# Altium PCB triumvi_integrated_v2_base.PcbDoc (part 1 of 2)
Units mil, origin at the board's own origin, x right, y up, seen from the top; angles counter-clockwise.
Board outline 2450 x 750 mil, 6 copper layers (Top Layer, GND, Signal Layer 1, Signal Layer 2, VCC, Bottom Layer), stack 48.468 mil thick; 139 components, 107 nets, 501 pads, 187 vias.
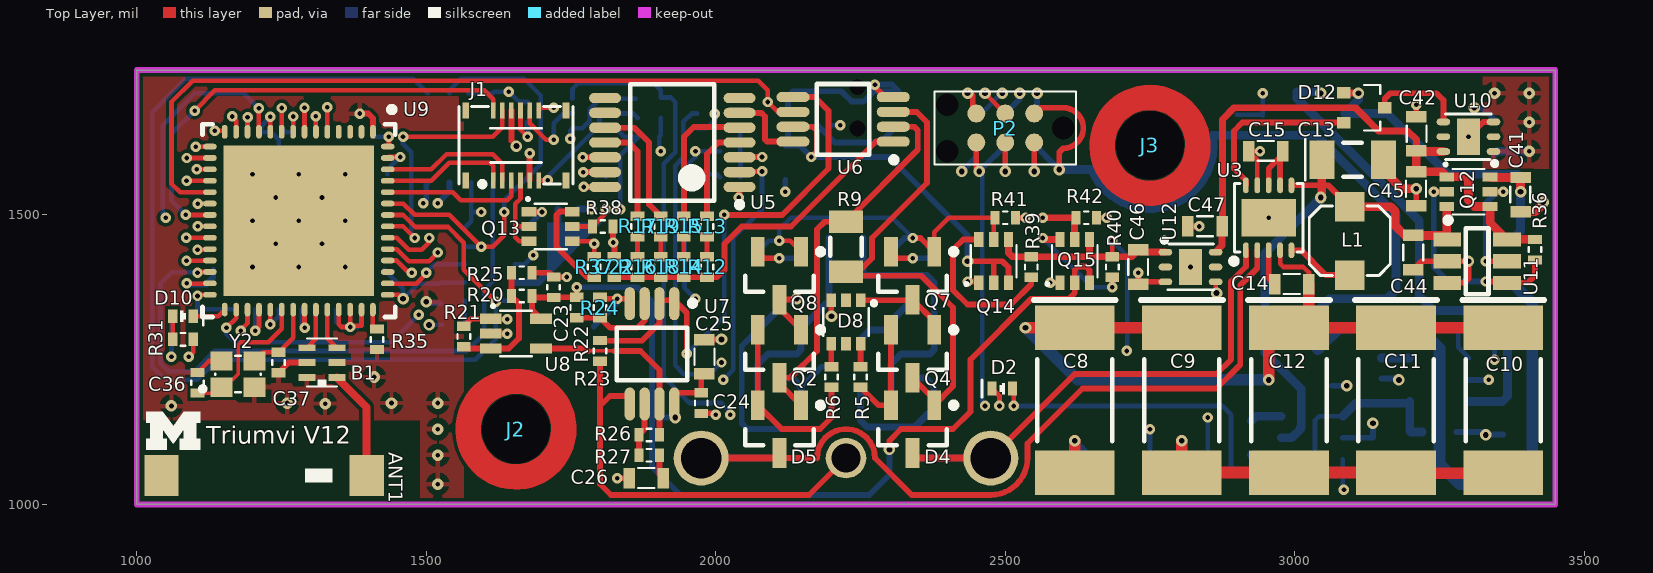
[diagram p0: Top Layer view]
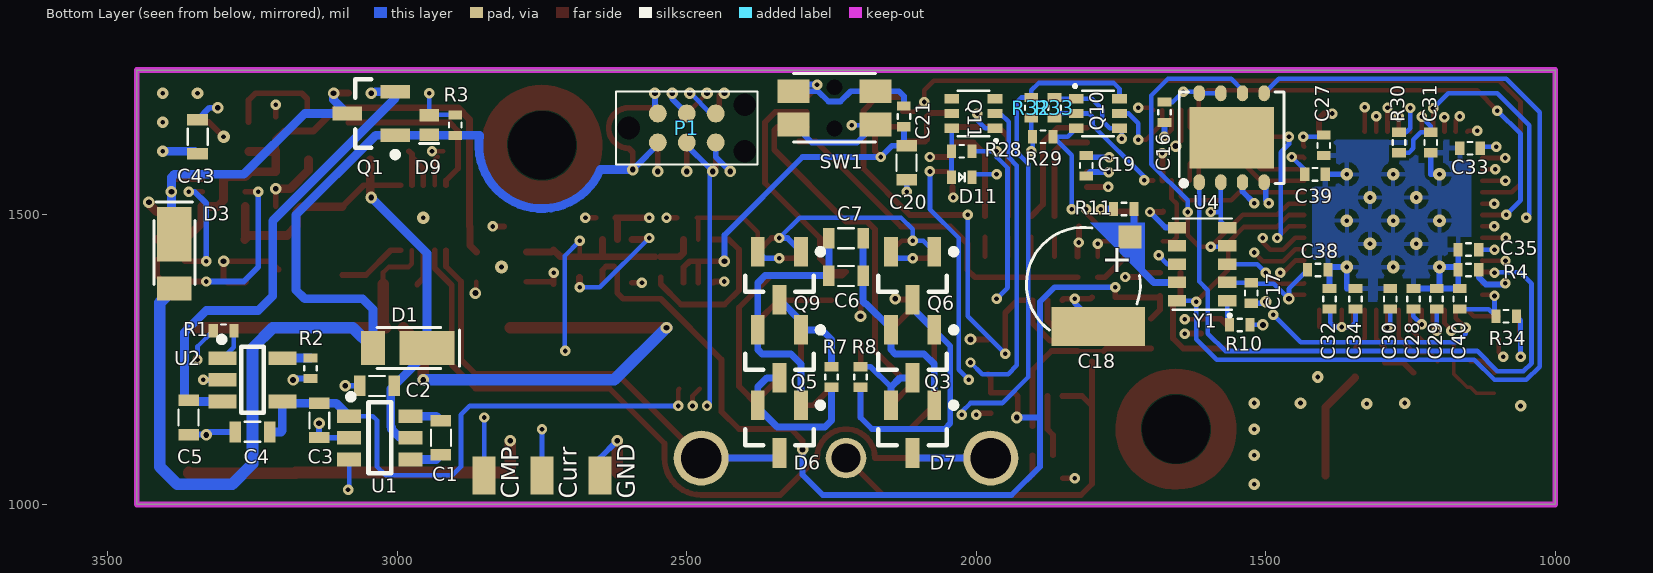
[diagram p1: Bottom Layer view, seen from below]
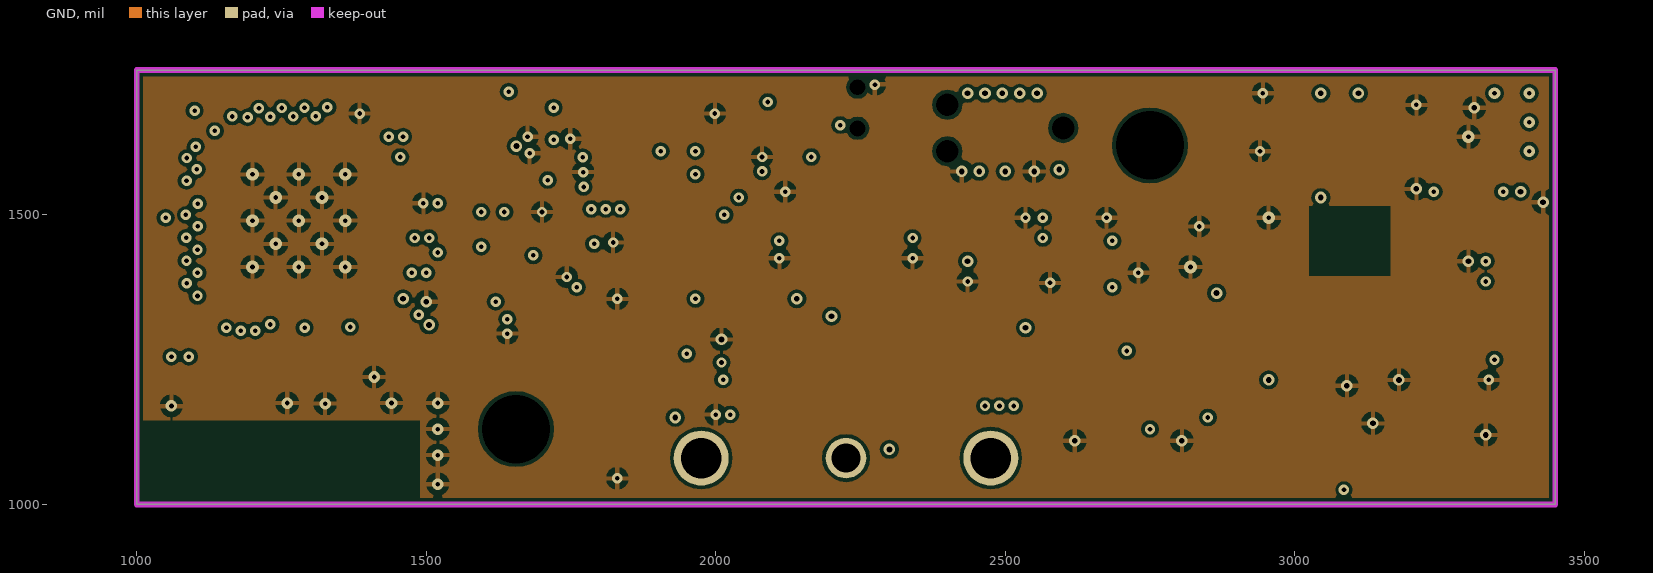
[diagram p2: GND]
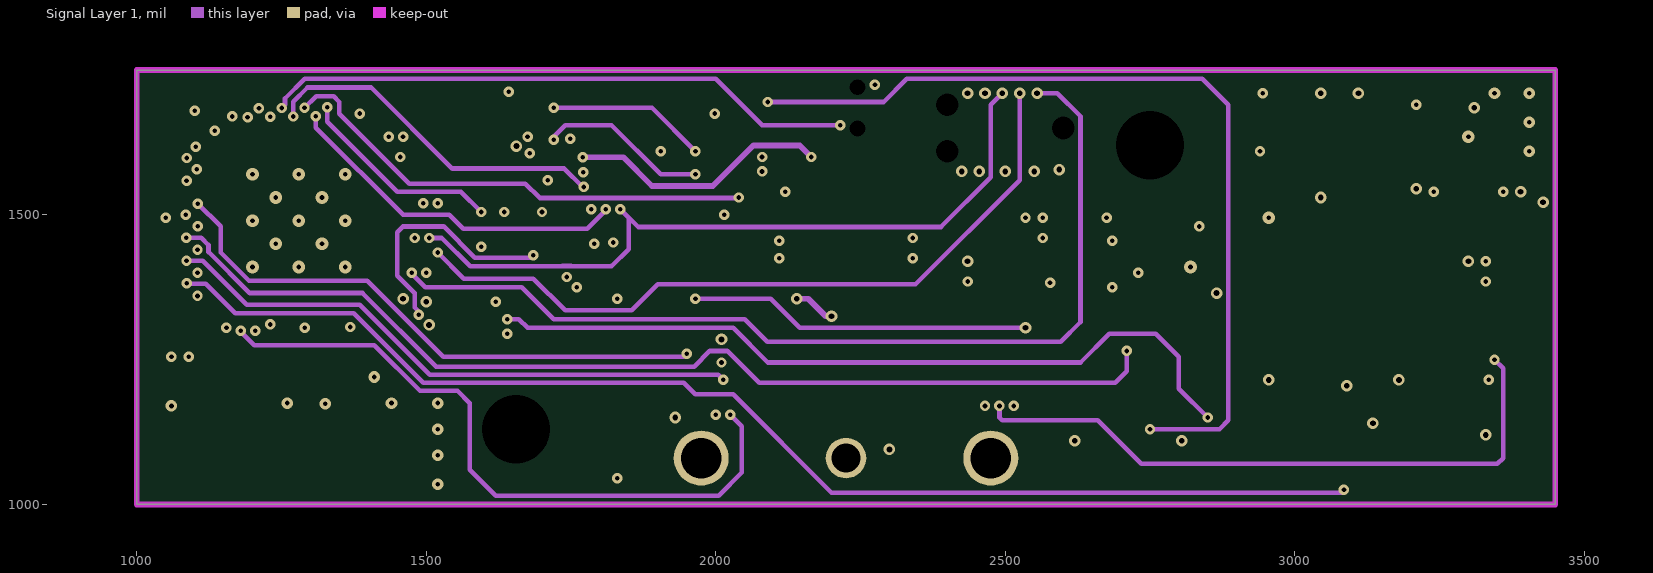
[diagram p3: Signal Layer 1]
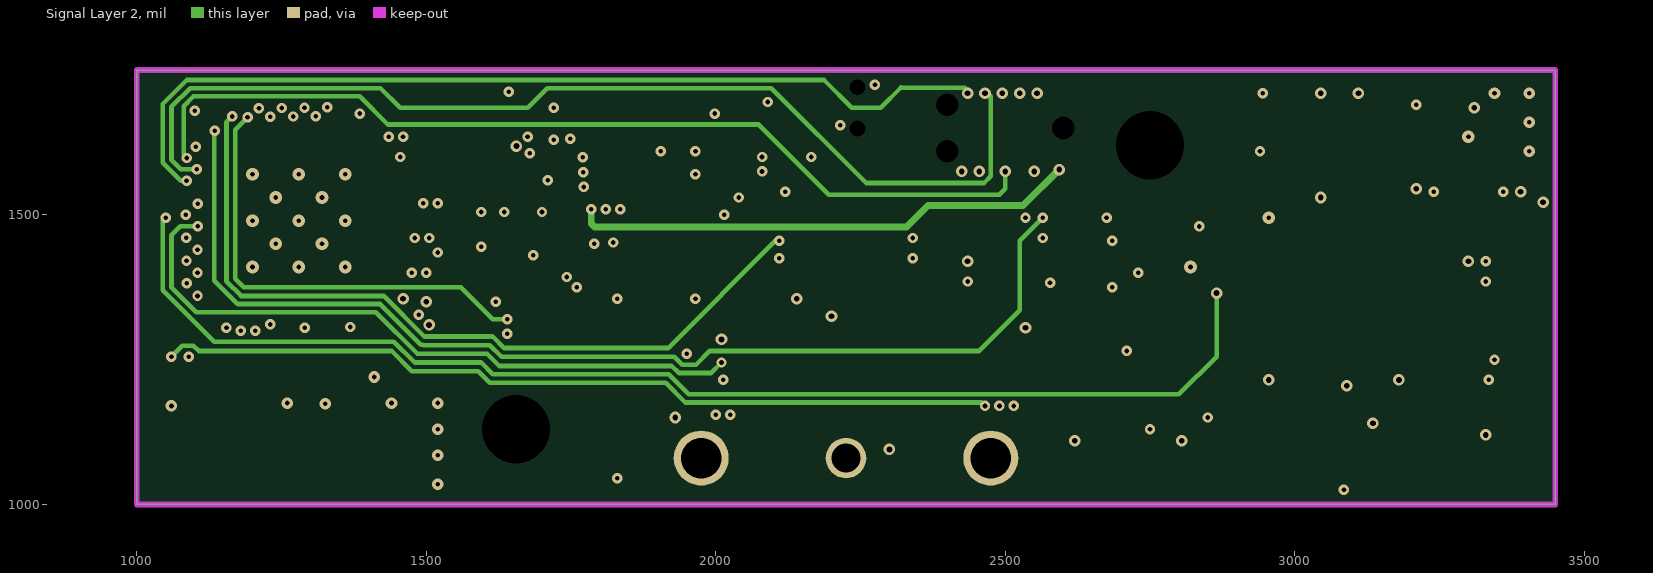
[diagram p4: Signal Layer 2]
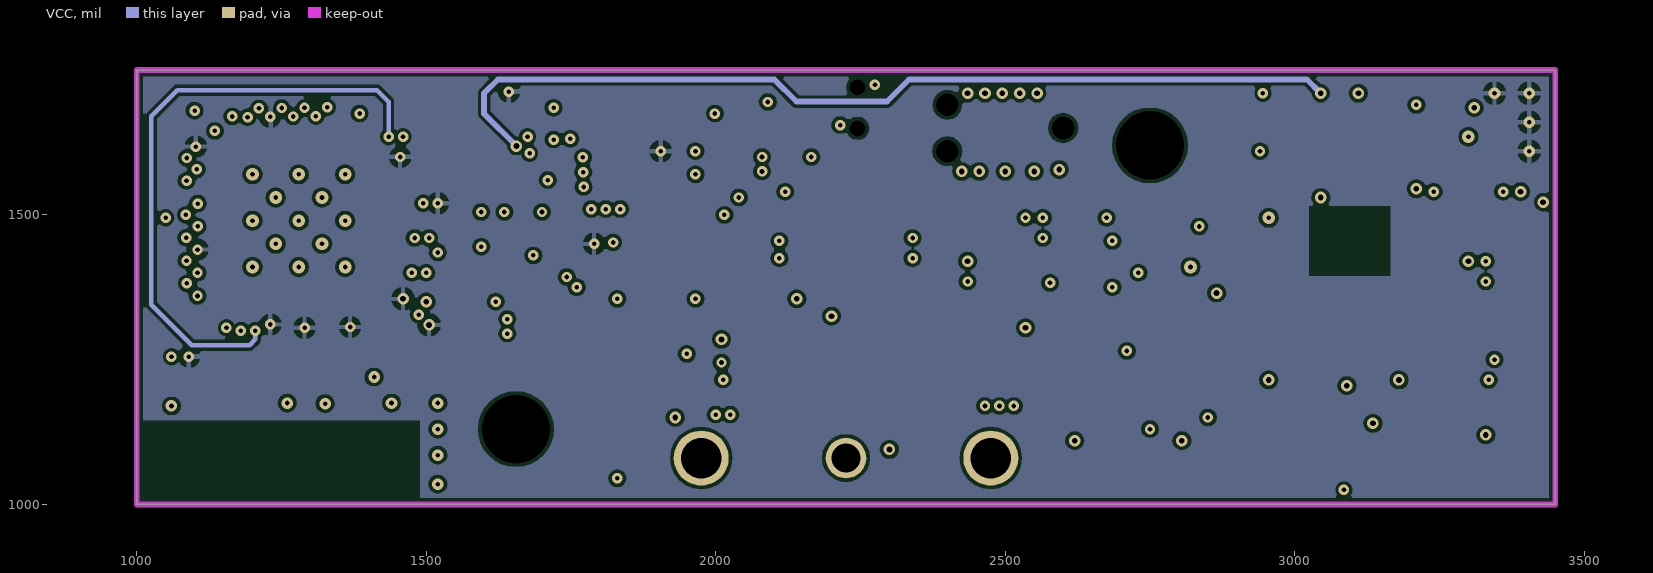
[diagram p5: VCC]

## Layer stack, top to bottom
Top Solder: solder mask 0.4, Solder Resist, Dk 3.5
Top Layer: signal copper 1.4
Dielectric 1: core 10, FR-4, Dk 4.2
GND: signal copper 1.417
Dielectric 5: core 10, Dk 4.2
Signal Layer 1: signal copper 1.417
Dielectric 4: prepreg 5, Dk 4.2
Signal Layer 2: signal copper 1.417
Dielectric 2: core 10, Dk 4.2
VCC: signal copper 1.417
Dielectric 3: prepreg 5, Dk 4.2
Bottom Layer: signal copper 1.4
Bottom Solder: solder mask 0.4, Solder Resist, Dk 3.5

## Board outline
1000,1000 3450,1000 3450,1750 1000,1750

## Design rules (kind name [scope] priority, off if disabled: settings)
Clearance "non plated holes" [InPadClass('NPHOLES')] p1: gap=10 // Sunstone Circuits Minimum Clearance Rule (MLB~4&6 Layer Designs)
Clearance "Clearance~Sunstone Circuits" [All] p2: gap=6 // Sunstone Circuits Minimum Clearance Rule (MLB~4&6 Layer Designs)
DiffPairsRouting [All] p1: maxlimit=10 minlimit=10 mostfreqgap=10 toplayer_minwidth=6 toplayer_maxwidth=15 toplayer_prefwidth=15 midlayer1_minwidth=6 midlayer1_maxwidth=15 midlayer1_prefwidth=15 midlayer2_minwidth=6 midlayer2_maxwidth=15 midlayer2_prefwidth=15 midlayer3_minwidth=15 midlayer3_maxwidth=15 midlayer3_prefwidth=15 midlayer4_minwidth=15 midlayer4_maxwidth=15 midlayer4_prefwidth=15 bottomlayer_minwidth=6 bottomlayer_maxwidth=15 bottomlayer_prefwidth=15 maxuncoupledlength=500
HoleSize "HoleSize~Sunstone Circuits" [All] p1: absolutevalues=TRUE maxlimit=251 minlimit=8 maxpercent=80.000 minpercent=20.000 // Sunstone Circuits Hole Size Rule (MLB~4&6 Layer Designs)
HoleSize Testpoint [All] p2: absolutevalues=TRUE maxlimit=100 minlimit=1 maxpercent=80.000 minpercent=20.000
HoleSize TestPointUsage [All] p3: absolutevalues=TRUE maxlimit=100 minlimit=1 maxpercent=80.000 minpercent=20.000
MinimumAnnularRing "MinimumAnnularRing~Sunstone Circuits" [All] p1 off: minimumring=7 // Sunstone Circuits Minimum Annular Ring (MLB~4&6 Layer Designs)
MinimumSolderMaskSliver [All] p1 off: minsoldermaskwidth=10
PlaneClearance "PlaneClearance~Sunstone Circuits" [All] p1: clearance=12 // Sunstone Circuits Power Plane Clearance Rule (MLB~4&6 Layer Designs)
PlaneConnect "PlaneConnect~Sunstone Circuits" [All] p1: planeconnectstyle=Relief reliefexpansion=10 reliefentries=4 reliefconductorwidth=8 reliefairgap=10 // Sunstone Circuits Power Plane Connect Rule (MLB~4&6 Layer Designs)
PolygonConnect "PolygonConnect~Sunstone Circuits" [All] p1: connectstyle=Relief reliefconductorwidth=8 reliefentries=4 polygonreliefangle="90 Angle" airgapwidth=10 // Sunstone Circuits Polygon Connect Style (MLB~4&6 Layer Designs)
RoomDefinition U_iv_sensing [InComponentClass('U_iv_sensing')] p1 off: confinementstyle=ConfineIn formatcopy=TRUE lockcomponents=FALSE outline 1536.3,1247.52 1536.3,1332.48 1579.99,1332.48 1579.99,1357.44 1622.52,1357.44 1622.52,1428.7 1761.46,1428.7 1761.46,1746.22 2075,1746.22 2075,1746.85 2345,1746.85 2345,1575.28 2154.61,1575.28 2154.61,1533.74 2088.54,1533.74 2088.54,1497.87 2014.61,1497.87 2014.61,1198.74 2003.7,1198.74 2003.7,1132.52 1927.48,1132.52 1927.48,1106.3 1926.26,1106.3 1926.26,1030.39 1813.74,1030.39 1813.74,1077.52 1801.3,1077.52 1801.3,1222.52 1771.3,1222.52 1771.3,1243.66 1579.99,1243.66 1579.99,1247.52
RoomDefinition U_fram_rtc [InComponentClass('U_fram_rtc')] p2 off: confinementstyle=ConfineIn formatcopy=TRUE lockcomponents=FALSE outline 1455.85,1529.68 1455.85,1736.78 1661.95,1736.78 1661.95,1719.76 1703.7,1719.76 1703.7,1695.56 2974.73,1695.56 2974.73,1611 1925.93,1611 1925.93,1260.7 1695.7,1260.7 1695.7,1281.3 1502.52,1281.3 1502.52,1322.52 1496.3,1322.52 1496.3,1529.68
RoomDefinition U_power_supply [InComponentClass('U_power_supply')] p3 off: confinementstyle=ConfineIn formatcopy=TRUE lockcomponents=FALSE outline 1642.01,1418.82 1642.01,1542.44 3053.9,1542.44 3053.9,1741.26 3186.1,1741.26 3186.1,1707.99 3372.99,1707.99 3372.99,1691.26 3379.61,1691.26 3379.61,1591.26 3424.61,1591.26 3424.61,1482.48 3443.7,1482.48 3443.7,1397.52 3403.59,1397.52 3403.59,1342.09 2892.99,1342.09 2892.99,1337.01 2747.01,1337.01 2747.01,1347.01 2417.56,1347.01 2417.56,1367.52 1761.3,1367.52 1761.3,1418.82
RoomDefinition U_mcu [InComponentClass('U_mcu')] p4 off: confinementstyle=ConfineIn formatcopy=TRUE lockcomponents=FALSE outline 1000.31,1000.63 1000.31,1099.37 1037.52,1099.37 1037.52,1353.7 1086.93,1353.7 1086.93,1701.77 1717.99,1701.77 1717.99,1737.44 2133.57,1737.44 2133.57,1781.61 2356.43,1781.61 2356.43,1613.44 2077.01,1613.44 2077.01,1612.56 2067.48,1612.56 2067.48,1536.3 1473.07,1536.3 1473.07,1296.93 1443.7,1296.93 1443.7,1242.52 1439.69,1242.52 1439.69,1000.63
RoomDefinition U_energy_harvesting [InComponentClass('U_energy_harvesting')] p5 off: confinementstyle=ConfineIn formatcopy=TRUE lockcomponents=FALSE outline 2525.35,995.79 2525.35,1368.23 2875.12,1368.23 2875.12,1582.76 2893.74,1582.76 2893.74,1644.61 3006.26,1644.61 3006.26,1644.37 3190.71,1644.37 3190.71,1368.23 3454.65,1368.23 3454.65,995.79
RoomDefinition U_ct_switching [InComponentClass('U_ct_switching')] p6 off: confinementstyle=ConfineIn formatcopy=TRUE lockcomponents=FALSE outline 2019.29,1041.26 2019.29,1483.74 2168.74,1483.74 2168.74,1494.61 2176.61,1494.61 2176.61,1526.85 2273.39,1526.85 2273.39,1494.61 2281.26,1494.61 2281.26,1483.74 2430.71,1483.74 2430.71,1041.26
RoomDefinition U_connector [InComponentClass('U_connector')] p7 off: confinementstyle=ConfineIn formatcopy=TRUE lockcomponents=FALSE outline 1540.39,1015.51 1540.39,1244.71 1544.07,1244.71 1544.07,1707.41 2365.98,1707.41 2365.98,1724.96 2635.39,1724.96 2635.39,1734.71 2864.33,1734.71 2864.33,1505.51 1769.33,1505.51 1769.33,1015.51
RoomDefinition U_charging [InComponentClass('U_charging')] p8 off: confinementstyle=ConfineIn formatcopy=TRUE lockcomponents=FALSE outline 1107.52,1376.3 1107.52,1433.7 2871.3,1433.7 2871.3,1697.48 2956.26,1697.48 2956.26,1755.87 3133.74,1755.87 3133.74,1535.08 3432.93,1535.08 3432.93,1339.3 3394.61,1339.3 3394.61,1093.74 3286.26,1093.74 3286.26,1090.39 3169.61,1090.39 3169.61,1088.74 3116.82,1088.74 3116.82,1033.15 2943.18,1033.15 2943.18,1058.74 2890.39,1058.74 2890.39,1222.07 2879.92,1222.07 2879.92,1376.3
RoutingVias "RoutingVias~Sunstone Circuits" [All] p1: holewidth=16 width=30 viastyle="Through Hole" minholewidth=6 minwidth=18 maxholewidth=20 maxwidth=40 // Sunstone Circuits Routing Vias Rule (MLB~4&6 Layer Designs)
ShortCircuit "ShortCircuit~Sunstone Circuits" [All] p1: allowed=FALSE // Sunstone Circuits Short Circuit Rule~Do Not Allow (MLB~4&6 Layer Designs)
SilkToSilkClearance [All] p1 off: silktosilkclearance=10
SilkToSolderMaskClearance [IsPad] p1 off: minsilkscreentomaskgap=10 clearancetoexposedcopper=TRUE
SolderMaskExpansion TentVias [isVia] p1: expansion=-20 // Sunstone Circuits Solder Mask Expansion Rule (MLB~4&6 Layer Designs)
SolderMaskExpansion "SolderMaskExpansion~Sunstone Circuits" [All] p2: expansion=3 // Sunstone Circuits Solder Mask Expansion Rule (MLB~4&6 Layer Designs)
ViasUnderSMD "ViasUnderSMD~Sunstone Circuits" [All] p1: allowed=FALSE // Sunstone Circuits Vias Under SMD~Do Not Allow (MLB~4&6 Layer Designs)
Width "Width~Sunstone Circuits" [All] p1: maxlimit=100 minlimit=6 preferedwidth=10 // Sunstone Circuits Minimum Width Rule (MLB~4&6 Layer Designs)
22 further rules are at their usual default settings.

## Classes and differential pairs
component class U_charging: C1 C2 C3 C4 C5 D1 D2 D3 Q1 R1 R2 R3 R4 U1 U2
component class U_connector: J1 J2 J3 P1 P2
component class U_ct_switching: C6 C7 D4 D5 D6 D7 D8 Q2 Q3 Q4 Q5 Q6 Q7 Q8 Q9 R5 R6 R7 R8 R9
component class U_energy_harvesting: C8 C9 C10 C11 C12 C13 C14 C15 L1 U3
component class U_fram_rtc: C16 C17 C18 D9 R10 R11 U4 Y1
component class U_iv_sensing: C19 C20 C21 C22 C23 C24 C25 C26 R12 R13 R14 R15 R16 R17 R18 R19 R20 R21 R22 R23 R24 R25 R26 R27 U5 U6 U7 U8
component class U_mcu: ANT1 B1 C27 C28 C29 C30 C31 C32 C33 C34 C35 C36 C37 C38 C39 C40 D10 D11 Q10 Q11 R28 R29 R30 R31 R32 R33 R34 R35 SW1 U9 Y2
component class U_power_supply: C41 C42 C43 C44 C45 C46 C47 D12 Q12 Q13 Q14 Q15 R36 R37 R38 R39 R40 R41 R42 U10 U11 U12
differential pair CC2538_RF: +CC2538_RF_P -CC2538_RF_N

## Components (designator, comment, footprint, x,y, rotation, side; value= is the part's Value field where it differs from the comment)
ANT1 "2450AT45A100" 2450AT45A100 1220,1050 r180 top
B1 "2450BM15A0002E" 2450BM15A0002 1320,1245 r180 top
C1 "1u" 0603 2925,1115 r90 bottom
C2 "1u" 0603 3035,1205 r180 bottom
C3 "1u" 0603 3135,1145 r90 bottom
C4 "4.7u" 0603 3250,1125 r0 bottom
C5 "4.7u" 0603 3360,1150 r270 bottom
C6 "0.068u" 0603 2225,1395 r180 bottom
C7 "10000p" 0603 2225,1460 r180 bottom
C8 "220u" 2917 2620,1180 r270 top
C9 "220u" 2917 2805,1180 r270 top
C10 "220u" 2917 3360,1180 r270 top
C11 "220u" 2917 3175,1180 r270 top
C12 "220u" 2917 2990,1180 r270 top
C13 "100u" "1206 - POLAR MARKING" 3100,1595 r0 top
C14 "1u" 0603 2995,1380 r180 top
C15 "4.7u" 0603 2950,1610 r180 top
C16 "0.1u" 0402 1675,1677.28 r270 bottom
C17 "0.1u" 0402 1525,1365 r270 bottom
C18 "80m" XH414HG-IV01E 1815,1380 r180 bottom
C19 "0.1u" 0402 1810,1585 r270 bottom
C20 "10u" 0603 2120,1590 r270 bottom
C21 "0.1u" 0402 2125,1670 r90 bottom
C22 "18p" 0402 1825,1410 r90 top
C23 "0.1u" 0402 1720,1375 r90 top
C24 "0.1u" 0402 1975,1175 r270 top
C25 "10u" 0603 1980,1255 r90 top
C26 "10u" 0603 1880,1045 r180 top
C27 "0.1u" 0402 1400,1620 r270 bottom
C28 "0.1u" 0402 1245,1355 r90 bottom
C29 "0.1u" 0402 1205,1355 r90 bottom
C30 "0.1u" 0402 1285,1355 r90 bottom
C31 "0.1u" 0402 1215,1625 r270 bottom
C32 "0.1u" 0402 1390,1355 r90 bottom
C33 "0.1u" 0402 1147.28,1615 r0 bottom
C34 "220p" 0402 1345,1355 r90 bottom
C35 "0.1u" 0402 1150,1440 r0 bottom
C36 "12p" 0402 1105,1210 r90 top
C37 "12p" 0402 1245,1245 r270 top
C38 "0.1u" 0402 1410,1405 r180 bottom
C39 "0.1u" 0402 1415,1570 r180 bottom
C40 "1000p" 0402 1165,1355 r90 bottom
C41 "4.7u" 0603 3390,1535 r270 top
C42 "4.7u" 0603 3210,1640 r90 top
C43 "4.7u" 0603 3345,1635 r90 bottom
C44 "4.7u" 0603 3205,1435 r270 top
C45 "10u" 0603 3210,1545 r270 top
C46 "4.7u" 0603 2730,1410 r270 top
C47 "4.7u" 0603 2845,1480 r180 top
D1 "DFLS130L" PowerDI123 2980,1270 r180 bottom
D2 "APG1005CGC-T" "0402 - LED" 2495,1200 r180 top
D3 "DFLS130L" PowerDI123 3385,1435 r90 bottom
D4 "D_BAS40-04" SOT23-3 2340,1130 r270 top
D5 "D_BAS40-04" SOT23-3 2110,1130 r270 top
D6 "D_BAS40-04" SOT23-3 2340,1130 r270 bottom
D7 "D_BAS40-04" SOT23-3 2110,1130 r270 bottom
D8 "BAS40TW" SOT-363 2225,1315 r180 top
D9 "CZRER52C3V6" 0503/SOD-723F 2945,1655 r270 bottom
D10 "LED, Red" "0402 - LED" 1080,1325 r0 top
D11 "CDBQR0130L" "0402 - DIODE" 2025,1565 r180 bottom
D12 "BAV70W-7-F" SOT323 3120,1685 r270 top
J1 "DF40B(2.0)-12DS-0.4V" DF40B(2.0)-12DS-0.4V 1655,1620 r0 top locked
J2 "9774020243R" 9774020243R 1655,1130 r0 top
J3 "9774020243R" 9774020243R 2750,1620 r0 top
L1 "10u" CDRH2D18 3095,1455 r270 top
P1 "TC2030" TC2030-IDC-NLFP 2500,1650 r180 bottom
P2 "TC2030" TC2030-IDC-NLFP 2500,1650 r180 top
Q1 "Si2369DS" SOT23-3 3045,1675 r0 bottom
Q2 "Si2367DS" SOT23-3 2110,1260 r270 top
Q3 "Si2342DS" SOT23-3 2110,1260 r270 bottom
Q4 "Si2367DS" SOT23-3 2340,1260 r270 top
Q5 "Si2342DS" SOT23-3 2340,1260 r270 bottom
Q6 "Si2338DS" SOT23-3 2110,1395 r270 bottom
Q7 "Si2338DS" SOT23-3 2340,1395 r270 top
Q8 "Si2338DS" SOT23-3 2110,1395 r270 top
Q9 "Si2338DS" SOT23-3 2340,1395 r270 bottom
Q10 "DMN2004DWK" SC70-6 1790,1675 r270 bottom
Q11 "DMN2004DWK" SC70-6 2005,1675 r90 bottom
Q12 "Si1965DH" SC70-6 3300,1540 r270 top
Q13 "Si1865DDL" SC70-6 1715,1480 r270 top
Q14 "Si1865DDL" SC70-6 2480,1420 r0 top
Q15 "Si1865DDL" SC70-6 2620,1420 r0 top
R1 "910" 0402 3300,1300 r180 bottom
R2 "47k" 0402 3150,1235 r270 bottom
R3 "47k" 0402 2900,1655 r90 bottom
R4 "1Meg" 0402 1150,1405 r0 bottom
R5 "47k" 0402 2250,1220 r90 top
R6 "47k" 0402 2200,1220 r90 top
R7 "1Meg" 0402 2250,1220 r90 bottom
R8 "1Meg" 0402 2200,1220 r270 bottom
R9 "20" 0805 2225,1445 r90 top
R10 "10k" 0402 1545,1310 r180 bottom
R11 "10k" 0402 1745,1510 r180 bottom
R12 "4.32k" 0402 1985,1410 r90 top
R13 "45.3k" 0402 1985,1480 r90 top
R14 "620" 0402 1945,1410 r90 top
R15 "24k" 0402 1945,1480 r90 top
R16 "20" 0402 1865,1410 r90 top
R17 "12.1k" 0402 1865,1480 r90 top
R18 "110" 0402 1905,1410 r90 top
R19 "5.76k" 0402 1905,1480 r90 top
R20 "100k" 0402 1665,1360 r180 top
R21 "2Meg" 0402 1565,1290 r90 top
R22 "1Meg" 0402 1760,1340 r270 top
R23 "100k" 0402 1800,1265 r270 top
R24 "1Meg" 0402 1800,1340 r90 top
R25 "100k" 0402 1665,1400 r0 top
R26 "47k" 0402 1885,1120 r0 top
R27 "100" 0402 1885,1085 r0 top
R28 "47k" 0402 2025,1610 r0 bottom
R29 "1Meg" 0402 1885,1635 r180 bottom
R30 "1Meg" 0402 1270,1625 r90 bottom
R31 "2.2k" 0402 1080,1285 r0 top
R32 "1Meg" 0402 1905,1685 r90 bottom
R33 "1Meg" 0402 1865,1685 r90 bottom
R34 "2.2k" 0402 1085,1325 r180 bottom
R35 "56k" 0402 1415,1285 r270 top
R36 "470k" 0402 3415,1440 r270 top
R37 "1Meg" 0402 1790,1410 r270 top
R38 "1Meg" 0402 1805,1480 r0 top
R39 "1Meg" 0402 2545,1410 r270 top
R40 "1Meg" 0402 2685,1410 r270 top
R41 "1Meg" 0402 2500,1495 r0 top
R42 "1Meg" 0402 2640,1495 r0 top
SW1 "EVQP7C" EVQP7C 2245,1685 r0 bottom
U1 "LTC3200-5" SOT23-6 3030,1115 r180 bottom
U2 "MCP73831" TSOT23-5 3250,1215 r180 bottom
U3 "LTC3588EDD-1#PBF" QFN-10 2955,1495 r90 top
U4 "FM25V02A-DGTR" TDFN-8 1558.9,1633.23 r90 bottom
U5 "ADG604" TSSOP-14 1925,1625 r180 top
U6 "INA333" MSOP-8 2220,1665 r180 top
U7 "MCP6032" MSOP-8 1890,1260 r270 top
U8 "TS881" SC70-5 1655,1295 r270 top
U9 "CC2538" QFN56 1280,1490 r270 top
U10 "ADP151_LFCSP" CP-6-3 3300,1635 r180 top
U11 "LTC4412" TSOT-23 3315,1420 r0 top
U12 "ADP151_LFCSP" CP-6-3 2820,1410 r0 top
Y1 "RV-3049-C3" RV-3049-C3 1610,1415 r90 bottom
Y2 "FA-128" FA-128 1175,1225 r0 top

## Footprints (in the part's own frame and the unit in brackets; to place one, negate y for a bottom-side part, rotate by r counter-clockwise, add the part's x,y. Pads: shape width x height; smd on the part's side, far side on the other; paste and mask are expansions set on the pad)
0402 [mm] "2-Leads, Body 1.00x0.50mm, IPC Medium Density"
  rect 0.4x0.6 smd: 1(-0.45,0) 2(0.45,0)
  silkscreen extent -0.1,-0.28 0.1,0.28, body extent -0.53,-0.28 0.53,0.27, height 0.4
"0402 - DIODE" [mm] "2-Leads, Body 1.00x0.50mm, IPC Medium Density"
  rect 0.4x0.6 smd: 1(-0.45,0) 2(0.45,0)
  silkscreen extent -0.13,-0.18 0.13,0.18, body extent -0.53,-0.28 0.53,0.27, height 0.4
"0402 - LED" [mm] "2-Leads, Body 1.00x0.50mm, IPC Medium Density"
  rect 0.4x0.6 smd: 1(-0.45,0) 2(0.45,0)
  silkscreen extent -0.13,-0.38 0.89,0.38, body extent -0.53,-0.28 0.53,0.27, height 0.4
0503/SOD-723F [mm]
  rect 0.55x0.85 smd: 1(-0.425,0) 2(0.425,0)
  silkscreen extent 0.8,-0.43 0.8,0.43, body extent -0.58,-0.33 0.58,0.33, height 0.6
0603 [mm] "2-Leads, Body 1.55x0.85mm, IPC Medium Density"
  rect 0.5x0.9 smd: 1(-0.75,0) 2(0.75,0)
  silkscreen extent -0.35,-0.45 0.35,0.43, body extent -0.75,-0.42 0.75,0.43, height 0.5
0805 [mm] "Chip Resistor, Body 2.0x1.2mm, IPC Low Density"
  rect 1x1.5 smd: 1(-1.1,0) 2(1.1,0)
  silkscreen extent -0.4,-0.7 0.4,0.7, body extent -1.07,-0.7 1.07,0.7, height 0.7
"1206 - POLAR MARKING" [mm]
  rect 1.1x1.7 smd: 1(-1.35,0) 2(1.35,0)
  silkscreen extent -2.07,-0.9 0.4,0.91, body extent -1.58,-0.83 1.58,0.82, height 1.59
2450AT45A100 [mm] "Johnson Technology 2.4 GHz chip antenna"
  rect 1.5x1.8 smd: 1(-4.5,0) ""(4.5,0)
  silkscreen extent -3,-0.3 -1.8,0.3, body extent -4.8,-1 4.8,1, height 1.2
2450BM15A0002 [mm] "Chip Array, Flat, 6-Leads, Pitch 0.65mm,  Body 2.00x1.25mm,  IPC Medium Density"
  rect 0.75x0.3 smd: 1(-0.65,0.65) 2(-0.65,0) 3(-0.65,-0.65) 4(0.65,-0.65) 5(0.65,0) 6(0.65,0.65)
  silkscreen extent -0.65,-1.05 0.65,1.05, body extent -0.67,-1.05 0.67,1.05, height 0.81
2917 [mm] "Chip Capacitor, 2-Leads, Body 7.30x3.20mm, IPC Medium Density"
  rect 1.95x3.5 smd: 1(-3.175,0) 2(3.175,0)
  silkscreen extent -4.4,-1.8 1.8,1.8, body extent -3.65,-2.15 3.65,2.15, height 4.31
9774020243R [mm] "m2 standoff, 2mm stack height"
  round 0 hole 3 unplated: ""(0,0)
  Top Layer region: 2.65,0 2.302,-1.312 1.35,-2.28 0.044,-2.65 -1.274,-2.324 -2.257,-1.388 -2.649,-0.088 -2.345,1.235 -1.426,2.234 -0.132,2.647 1.196,2.365 2.21,1.462 2.644,0.176 2.644,0.176 2.625,0.175 1.55,0.175 1.54,0.177 1.254,0.911 0.644,1.41 -0.133,1.544 -0.875,1.279 -1.391,0.684 -1.547,-0.089 -1.304,-0.838 -0.723,-1.371 0.044,-1.549 0.8,-1.327 1.35,-0.762 1.55,0 1.55,0
  Top Layer region: 1.55,0 2.65,0 2.649,0.088 2.644,0.176 2.644,0.176 2.625,0.175 1.55,0.175 1.54,0.177 1.547,0.088 1.55,0
  body extent -2.17,-2.17 2.18,2.17, height 2
CDRH2D18 [mm] "Sumdia SMD power inductor"
  rect 1.3x1.3 smd: 1(-1.5,0) 2(1.5,0)
  silkscreen extent -1.52,-1.78 1.52,1.78, body extent -1.5,-1.7 1.5,1.8, height 2
CP-6-3 [mm] "QFN, 6-Leads, Body 2.00x2.00mm, Pitch 0.65mm, Thermal Pad 1.00x1.55mm, IPC Medium Density"
  oval 0.6x0.3 smd: 1(-1.1,0.65) 2(-1.1,0) 3(-1.1,-0.65) 4(1.1,-0.65) 5(1.1,0) 6(1.1,0.65)
  rect 1x1.6 smd: 7(0,0)
  silkscreen extent -1.25,-1 1,1.27, body extent -1,-1 1,1, height 0.6
DF40B(2.0)-12DS-0.4V [mm] "Hirose DF40 Series, 0.4 mm pitch, 2.0 mm stack height, 12 positions"
  rect 0.2x0.7 smd: 1(-1,-1.54) 2(-0.6,-1.54) 3(-0.2,-1.54) 4(0.2,-1.54) 5(0.6,-1.54) 6(1,-1.54) 7(1,1.54) 8(0.6,1.54) 9(0.2,1.54) 10(-0.2,1.54) 11(-0.6,1.54) 12(-1,1.54)
  rect 0.3x0.7 smd: ""(-2.2,-1.54) ""(-2.2,1.54) ""(2.2,-1.54) ""(2.2,1.54)
  silkscreen extent -2.5,-1.8 2.5,1.7, body extent -2.5,-1.69 2.5,1.69, height 1.9
EVQP7C [mm] "Panasonic EVQP7 tactile button"
  rect 1.4x1.05 smd: 1(-1.8,0.725) 1(1.8,0.725) 2(-1.8,-0.725) 2(1.8,-0.725)
  round 0 hole 0.7 unplated: ""(0,-0.9) ""(0,0.9)
  silkscreen extent -1.8,-1.5 1.8,1.5, body extent -1.8,-2.2 1.8,1.5, height 1.35
FA-128 [mm] "Seiko Epson FA-128 Crystal"
  rect 0.95x0.85 smd: 1(-0.725,-0.575) 2(0.725,-0.575) 3(0.725,0.575) 4(-0.725,0.575)
  silkscreen extent -1.63,-0.8 1,0.8, body extent -1,-0.8 1,0.8, height 0.5
MSOP-8 [mm] "TSOP, 8-Leads, Body 3.00x3.00mm, Pitch 0.65mm, IPC Medium Density"
  oval 1.45x0.45 smd: 1(-2.2,0.975) 2(-2.2,0.325) 3(-2.2,-0.325) 4(-2.2,-0.975) 5(2.2,-0.975) 6(2.2,-0.325) 7(2.2,0.325) 8(2.2,0.975)
  silkscreen extent -2.35,-1.55 1.15,1.9, body extent -2.45,-1.5 2.45,1.5, height 1.1
PowerDI123 [mm] "Diodes PowerDI123 pacakge"
  rect 1.05x1.5 smd: 1(-1.575,0)
  rect 2.4x1.5 smd: 2(0.8,0)
  silkscreen extent -1.4,-0.9 2.22,0.9, body extent -1.85,-0.9 1.85,0.9, height 1
QFN56 [mm] "QFN, 56-Leads, Body 8.00x8.00mm, Pitch 0.50mm, Thermal Pad 6.60x6.60mm, IPC Medium Density"
  oval 0.6x0.25 smd: 1(-3.9,3.25) 2(-3.9,2.75) 3(-3.9,2.25) 4(-3.9,1.75) 5(-3.9,1.25) 6(-3.9,0.75) 7(-3.9,0.25) 8(-3.9,-0.25) 9(-3.9,-0.75) 10(-3.9,-1.25) 11(-3.9,-1.75) 12(-3.9,-2.25) 13(-3.9,-2.75) 14(-3.9,-3.25) 29(3.9,-3.25) 30(3.9,-2.75) 31(3.9,-2.25) 32(3.9,-1.75) 33(3.9,-1.25) 34(3.9,-0.75) 35(3.9,-0.25) 36(3.9,0.25) 37(3.9,0.75) 38(3.9,1.25) 39(3.9,1.75) 40(3.9,2.25) 41(3.9,2.75) 42(3.9,3.25)
  oval 0.25x0.6 smd: 15(-3.25,-3.9) 16(-2.75,-3.9) 17(-2.25,-3.9) 18(-1.75,-3.9) 19(-1.25,-3.9) 20(-0.75,-3.9) 21(-0.25,-3.9) 22(0.25,-3.9) 23(0.75,-3.9) 24(1.25,-3.9) 25(1.75,-3.9) 26(2.25,-3.9) 27(2.75,-3.9) 28(3.25,-3.9) 43(3.25,3.9) 44(2.75,3.9) 45(2.25,3.9) 46(1.75,3.9) 47(1.25,3.9) 48(0.75,3.9) 49(0.25,3.9) 50(-0.25,3.9) 51(-0.75,3.9) 52(-1.25,3.9) 53(-1.75,3.9) 54(-2.25,3.9) 55(-2.75,3.9) 56(-3.25,3.9)
  rect 6.6x6.6 smd: 57(0,0)
  silkscreen extent -5,-4.22 4.22,4.23, body extent -4.08,-4.07 4.07,4.08, height 1
QFN-10 [mm] "QFN, 10-Leads, Body 4.00x4.00mm, Pitch 0.50mm, Thermal Pad 1.65x2.38mm, IPC Medium Density"
  oval 0.7x0.25 smd: 1(-1.425,1) 2(-1.425,0.5) 3(-1.425,0) 4(-1.425,-0.5) 5(-1.425,-1) 6(1.425,-1) 7(1.425,-0.5) 8(1.425,0) 9(1.425,0.5) 10(1.425,1)
  rect 1.65x2.38 smd: 11(0,0)
  silkscreen extent -2.02,-1.5 1.5,1.65, body extent -1.5,-1.5 1.5,1.5, height 0.75
RV-3049-C3 [mm] "RV-3049-C3"
  rect 0.5x0.8 smd: 1(-1.6,-1.1) 2(-0.8,-1.1) 3(0,-1.1) 4(0.8,-1.1) 5(1.6,-1.1) 6(1.6,1.1) 7(0.8,1.1) 8(0,1.1) 9(-0.8,1.1) 10(-1.6,1.1)
  silkscreen extent -2.26,-1.3 2,1.3, body extent -1.9,-1.3 1.9,1.3, height 0.9
SC70-5 [mm]
  rect 0.45x0.95 smd: 1(-0.65,-1.1) 2(0,-1.1) 3(0.65,-1.1) 4(0.65,1.1) 5(-0.65,1.1)
  silkscreen extent -1.2,-1 1,0.7, body extent -1,-0.7 1,0.7, height 1.1
SC70-6 [mm]
  rect 0.406x0.648 smd: 1(-0.65,-0.95) 2(0,-0.95) 3(0.65,-0.95) 4(0.65,0.95) 5(0,0.95) 6(-0.65,0.95)
  silkscreen extent -1.2,-1.01 1,0.7, body extent -1.1,-1.2 1.1,1.2, height 1.1
SOT23-3 [mm] "SOT23, 3-Leads, Body 2.9x1.3mm, Pitch 0.95mm, Lead Span 2.3mm, IPC Medium Density"
  rect 1.3x0.6 smd: 1(-1.05,0.95) 2(-1.05,-0.95) 3(1.05,0)
  silkscreen extent -1.17,-1.5 0.7,1.93, body extent -1.3,-1.5 1.3,1.5, height 1.1
SOT23-6 [mm] "SOT23, 6-Leads, Body 2.90x2.45mm, Pitch 0.95mm, IPC Medium Density"
  rect 1.05x0.6 smd: 1(-1.35,0.95) 2(-1.35,0) 3(-1.35,-0.95) 4(1.35,-0.95) 5(1.35,0) 6(1.35,0.95)
  silkscreen extent -1.4,-1.55 0.5,1.92, body extent -0.88,-1.52 0.87,1.53, height 1.45
SOT323 [mm]
  rect 0.5x0.6 smd: 1(-0.65,-0.9) 2(0.65,-0.9) 3(0,0.9)
  silkscreen extent -1,0 1,0.7, body extent -1,-0.7 1,0.7, height 1.1
SOT-363 [mm]
  rect 0.42x0.6 smd: 1(-0.65,-0.95) 2(0,-0.95) 3(0.65,-0.95) 4(0.65,0.95) 5(0,0.95) 6(-0.65,0.95)
  silkscreen extent -1.28,-0.88 1,0.6, body extent -1.1,-1.2 1.1,1.2, height 1.1
TC2030-IDC-NLFP [mil]
  round 31 smd paste-1181.1: 1(-50,-25) 2(-50,25) 3(0,-25) 4(0,25) 5(50,-25) 6(50,25)
  round 0 hole 39 unplated: ""(-100,0) ""(100,-40) ""(100,40)
  Top Layer pour cut-out: -50,25 -50,-25 50,-25 50,25
  silkscreen extent -122,-63 122,63
TDFN-8 [mm] "CYPRESS TDFN-8 (4 x 4.5 x 0.8 mm)"
  oval 0.7x0.5 smd: 1(-1.95,1.425) 2(-1.95,0.475) 3(-1.95,-0.475) 4(-1.95,-1.425) 5(1.95,-1.425) 6(1.95,-0.475) 7(1.95,0.475) 8(1.95,1.425)
  rect 2.7x3.7 smd: 9(0,0)
  silkscreen extent -2.1,-2.3 2,2.3, body extent -2,-2.3 2,2.3, height 0.8
TSOT23-5 [mm] "SOT23, 5-Leads, Body 2.90x2.80mm, Pitch 0.95mm, IPC Medium Density"
  rect 1.22x0.6 smd: 1(-1.31,0.95) 2(-1.31,0) 3(-1.31,-0.95) 4(1.31,-0.95) 5(1.31,0.95)
  silkscreen extent -1.48,-1.45 0.5,1.9, body extent -0.87,-1.45 0.87,1.45, height 1
TSOT-23 [mm] "SOT23, 6-Leads, Body 2.90x2.45mm, Pitch 0.95mm, IPC Medium Density"
  rect 1.22x0.62 smd: 1(-1.31,0.95) 2(-1.31,0) 3(-1.31,-0.95) 4(1.31,-0.95) 5(1.31,0) 6(1.31,0.95)
  silkscreen extent -1.4,-1.45 0.5,1.92, body extent -1.27,-1.45 1.27,1.45, height 1
TSSOP-14 [mm] "TSOP, 14-Leads, Body 5.00x4.40mm, Pitch 0.65mm, IPC Medium Density"
  oval 1.4x0.45 smd: 1(-2.95,1.95) 2(-2.95,1.3) 3(-2.95,0.65) 4(-2.95,0) 5(-2.95,-0.65) 6(-2.95,-1.3) 7(-2.95,-1.95) 8(2.95,-1.95) 9(2.95,-1.3) 10(2.95,-0.65) 11(2.95,0) 12(2.95,0.65) 13(2.95,1.3) 14(2.95,1.95)
  silkscreen extent -3.08,-2.55 1.85,2.85, body extent -3.19,-2.55 3.19,2.55, height 1.1
XH414HG-IV01E [mm] "Seiko instruments XH414HG-IV01E"
  rect 1x1 smd: 1(2.05,2.075)
  rect 4.1x1.7 smd: 2(0.65,-1.85)
  Top Layer region: 2.7,0.3 2.7,2.7 0.3,2.7
  silkscreen extent -2.5,-2.01 2.5,2.5, body extent -2.4,-2.4 2.4,2.4, height 1.85

## Part data
ANT1: "2.45 GHz High Gain SMD Chip Antenna"
B1: "2.45 GHz Balun for TI CC253X"
C1 C2 C3 C14: library part C1608X7R1C105K080AC, "1μF ±10% 16V Ceramic Capacitor X7R 0603"
C4 C5 C15 C41 C42 C43 C44 C46 C47: library part CGB3B1X5R1A475K055AC, "4.7μF ±10% 10V Ceramic Capacitor X5R 0603"
C6: library part C0603C683K5RACTU, "0.068μF ±10% 50V Ceramic Capacitor X7R 0603"
C7: library part C0603C103J5RACTU, "10000pF ∮5% 50V Ceramic Capacitor X7R 0603"
C8 C9 C10 C11 C12: library part T495X227K016ATE100, "220μF ±10% Molded Tantalum Capacitors 16V"
C13: library part F930J107MAA, "100μF ±20% Molded Tantalum Capacitors 6.3V 1206"
C16 C17 C19 C21 C23 C24 C27 C28 C29 C30 C31 C32 C33 C35 C38 C39: library part GRM155R71C104KA88D, "0.10μF ±10% 16V Ceramic Capacitor X7R 0402"
C18: library part XH414HG-IV01E, "80mF (EDLC) Supercapacitor 3.3V Coin"
C20 C25 C26 C45: library part C1608X5R0J106M080AB, "10μF ±20% 6.3V Ceramic Capacitor X5R 0603"
C22: library part 500R07S180GV4T, "18pF ∮2% 50V Ceramic Capacitor C0G, NP0 0402"
C34: library part C0402C221K5RACTU, "220pF ∮10% 50V Ceramic Capacitor X7R 0402"
C36 C37: library part 500R07S120GV4T, "12pF ∮2% 50V Ceramic Capacitor C0G, NP0 0402"
C40: library part C1005C0G1H102J050BA, "1000pF ∮5% 50V Ceramic Capacitor C0G, NP0 0402"
D1 D3: "1.0A SURFACE MOUNT SCHOTTKY BARRIER RECTIFIER"
D2: "Green 571nm LED Indication - Discrete 2V 0402 (1005 Metric)"
D4 D5 D6 D7: "SURFACE MOUNT SCHOTTKY BARRIER DIODE"
D8: library part D_BAS40TW, "SURFACE MOUNT SCHOTTKY BARRIER DIODE ARRAYS"
D9: "Zener Diode 3.6V 150mW ∮5% Surface Mount 0503 (1308 Metric)"
D10: library part SML-P12UTT86, "Red 620nm LED Indication - Discrete 2V 2-SMD"
D11: "Diode Schottky 30V 100mA Surface Mount 0402/SOD-923F"
D12: "Diode Array 1 Pair Common Cathode Standard 75V 150mA Surface Mount SC-70, SOT-323"
J1: "Hirose BM20 Series, 0.4mm pitch, 2mm stack height, 12 pos, header"
J2 J3: "2 mm stack height, m2 standoff"
L1: library part CDRH2D18/LDNP-100NC, "10μH Shielded Inductor 1A 180 mOhm Max Nonstandard"
P1 P2: "TC2030-MCP-NL"
Q1: "P-Channel 30-V (D-S) MOSFET"
Q2 Q4: "P-Channel 20 V (D-S) MOSFET"
Q3 Q5: "N-Channel 8 V (D-S) MOSFET"
Q6 Q7 Q8 Q9: "N-Channel 30 V (D-S) MOSFET"
Q10 Q11: "DUAL N-CHANNEL ENHANCEMENT MODE MOSFET"
Q12: "Dual P-Channel 12 V (D-S) MOSFET"
Q13 Q14 Q15: "Load Switch with Level-Shift"
R1: library part CRCW0402910RFKED, "RES SMD 910 OHM 1% 1/16W 0402"
R2 R3 R5 R6 R26 R28: library part CRCW040247K0FKED, "RES SMD 47K OHM 1% 1/16W 0402"
R4 R7 R8 R22 R24 R29 R30 R32 R33 R37 R38 R39 R40 R41 R42: library part CRCW04021M00FKED, "RES SMD 1M OHM 1% 1/16W 0402"
R9: library part RTAN0805BKE20R0, "RES SMD 20 OHM 0.1% 1/5W 0805"
R10 R11: library part CRCW040210K0FKED, "RES SMD 10K OHM 1% 1/16W 0402"
R12: library part CRCW04024K32FKED, "RES SMD 4.32K OHM 1% 1/16W 0402"
R13: library part RT0402DRD0745K3L, "RES SMD 45.3KOHM 0.5% 1/16W 0402"
R14: library part CRCW0402620RFKED, "RES SMD 620 OHM 1% 1/16W 0402"
R15: library part RT0402DRE0724KL, "RES SMD 24K OHM 0.5% 1/16W 0402"
R16: library part CRCW040220R0FKED, "RES SMD 20 OHM 1% 1/16W 0402"
R17: library part CRCW040212K1FKED, "RES SMD 12.1K OHM 1% 1/16W 0402"
R18: library part CRCW0402110RFKED, "RES SMD 110 OHM 1% 1/16W 0402"
R19: library part RC0402FR-075K76L, "RES SMD 5.76K OHM 0.5% 1/16W 0402"
R20 R23 R25: library part CRCW0402100KFKED, "RES SMD 100K OHM 1% 1/16W 0402"
R21: library part CRCW04022M00FKED, "RES SMD 2M OHM 1% 1/16W 0402"
R27: library part CRCW0402100RFKED, "RES SMD 100 OHM 1% 1/16W 0402"
R31 R34: library part CRCW04022K20FKED, "RES SMD 2.2K OHM 1% 1/16W 0402"
R35: library part CRCW040256K0FKED, "RES SMD 56K OHM 1% 1/16W 0402"
R36: library part CRCW0402470KJNED, "RES SMD 470K OHM 5% 1/16W 0402"
SW1: "3.5 mm⊙2.9 mm Side-operational SMD  Light Touch Switches"
U1: library part LTC3200ES6-5#TRMPBF, "Low Noise, Regulated   Charge Pump DC/DC Converters"
U2: "Miniature Single-Cell, Fully Integrated Li-Ion,  Li-Polymer Charge Management Controllers"
U3: "Piezoelectric Energy Harvesting Power Supply"
U4: "256-Kbit (32 K ⊙ 8) Serial (SPI) F-RAM"
U5: "1 pC Charge Injection, 100 pA Leakage  CMOS  5 V/5 V/3 V 4-Channel Multiplexer"
U6: "Micro-Power (50uA), Zero-Drift, Rail-to-Rail Out  Instrumentation Amplifier"
U7: "0.9 μA, High Precision Op Amps"
U8: "Rail-to-rail 0.9 V nanopower comparator"
U9: "A Powerful System-On-Chip for 2.4-GHz IEEE 802.15.4, 6LoWPAN  and ZigBee Applications"
U10 U12: "Ultralow Noise, 200 mA,  CMOS Linear Regulator"
U11: "Low Loss PowerPath Controller in ThinSOT"
Y1: "Real Time Clock Module with SPI-Bus"
Y2: "MHz Range Crystal Unit"

## Free pads (board coordinates)
  round 0 hole 20: ""(913,990) ""(913,1760) ""(938,990) ""(938,1760) ""(963,990) ""(963,1760) ""(3487,990) ""(3487,1760) ""(3512,990) ""(3512,1760) ""(3537,990) ""(3537,1760)
  round 95 hole 70: ""(1975,1080) ""(2475,1080)
  round 70 hole 50: ""(2225,1080)
  rect 40x65 smd far side: ""(2650,1050) ""(2750,1050) ""(2850,1050)

## Via types
v1: diameter 18, hole 8, Top Layer to Bottom Layer, 121 vias
v2: diameter 20, hole 10, Top Layer to Bottom Layer, 37 vias
v3: diameter 22, hole 8, Top Layer to Bottom Layer, 14 vias
v4: diameter 20, hole 8, Top Layer to Bottom Layer, 13 vias
v5: diameter 21.65, hole 8, Top Layer to Bottom Layer, 2 vias

## Nets (pads, with @x,y where several pads share a name; then routed paths per layer and width w, separated by ;. In a path a pad name is that pad's centre, name@x,y a point inside that pad or via, vN(x,y) a via of type N, cw(c..) or ccw(c..) an arc to the next point about the centre after c; other vN are vias at no path point)
BATTERYPACKDETECT: J1.3 U9.52 | length 249.7
  Top Layer w8: U9.52@1433.54,1539.21 1545.79,1539.21 1560,1525 1640,1525 1647.13,1532.13 J1.3@1647.13,1559.37
BATTERYPACKPOWER: J1.4 Q13.2 Q13.3 | length 154.5
  Top Layer w8: J1.4@1662.87,1559.37 1662.87,1528.08 1654,1519.2 1654,1486 ; Q13.3@1677.6,1454.41 1660.59,1454.41 1654,1461 1654,1486 ; Q13.2@1677.6,1480 1660,1480 1654,1486
BLD_CTRL: P2.5 U9.18 | length 1688.5
  Top Layer w8: v1(1086.1,1558.9) U9.18@1126.46,1558.9
  Top Layer w10: v2(2435,1710) 2440,1710 2444,1706 2444,1681 P2.5@2450,1675
  Signal Layer 2 w8: v1(1086.1,1558.9) 1076.3,1558.9 1045,1590.2 1045,1691.47 1086.53,1733 2187,1733 2235,1685 2285,1685 2320,1720 2320.5,1719.5 2430.5,1719.5 2435,1715 v2(2435,1710)
BLD_RX: P2.4 U9.16 | length 1712.4
  Top Layer w8: v1(1086.73,1598.27) U9.16@1126.46,1598.27
  Top Layer w10: v2(2500,1575) P2.4@2500,1625
  Signal Layer 2 w8: v1(1086.73,1598.27) 1081,1604 1081,1687.87 1098.13,1705 1385,1705 1434,1656 2074,1656 2195,1535 2490,1535 2500,1545 v2(2500,1575)
BLD_TX: P2.3 U9.17 | length 1899.1
  Top Layer w8: v1(1103.58,1578.58) U9.17@1126.46,1578.58 ; v2(2465,1710) P2.3@2500,1675 P2.3@2500,1680
  Signal Layer 2 w8: v1(1103.58,1578.58) 1076.42,1578.58 1060,1595 1060,1686.67 1092.33,1719 1421,1719 1455,1685 1675,1685 1709,1719 2096,1719 2260,1555 2463.28,1555 2475,1566.72 2475,1705 2470,1710 v2(2465,1710)
CC2538_RF_N: B1.3 U9.38 | length 72.7
  Top Layer w8: U9.38@1329.21,1336.46 1329.21,1286.97 B1.3@1345.59,1270.59
CC2538_RF_P: B1.4 U9.37 | length 72.1
  Top Layer w8: B1.4@1294.41,1270.59 1309.53,1285.71 U9.37@1309.53,1336.46
CT1: D5.3 D7.3 pad.@1975,1080 U3.2 | length 1487.9
  Top Layer w10: D5.3@2110,1088.66 2118.66,1080 2175,1080 cw(c2225,1080) 2275,1080 2338.64,1016.36 2475,1016.36 ccw(c2475,1080) 2538.64,1080 2538.64,1105 2633.64,1200 2865,1200 2906,1241 2906,1378.37 2935.32,1407.69 U3.2@2935.32,1438.9
  Top Layer w12: pad.@1975,1080 2101.34,1080 D5.3@2110,1088.66
  Bottom Layer w12: pad.@1975,1080 2101.34,1080 D7.3@2110,1088.66
CT2: D4.3 D6.3 pad.@2475,1080 U3.1 | length 962.1
  Top Layer w10: pad.@2475,1080 2620,1225 2865,1225 2890,1250 2890,1385 2915.63,1410.63 U3.1@2915.63,1438.9
  Top Layer w12: D4.3@2340,1088.66 2348.66,1080 pad.@2475,1080
  Bottom Layer w12: D6.3@2340,1088.66 2348.66,1080 pad.@2475,1080
CURRENT_WAVEFORM: pad.@2750,1050 U6.6 U9.19 | length 2926.5
  Top Layer w8: U9.19@1126.46,1539.21 1075,1539.21 1060,1554.21 1060,1695 1096.72,1731.72 2073.28,1731.72 2090,1715 v1(2090,1695) 2107.2,1677.8 U6.6@2127.32,1677.8
  Signal Layer 1 w8: v1(2090,1695) 2290,1695 2330,1735 2840,1735 2885,1690 2885,1145 2870,1130 v1(2750,1130)
  Bottom Layer w8: pad.@2750,1050 v1(2750,1130)
CURRENTMEASUREEN: Q6.1 Q7.1 Q8.1 Q9.1 Q14.5 R41.1 U9.13 | length 2043.4
  Top Layer w8: v1(1165,1670) 1171.73,1663.27 U9.13@1171.73,1643.54 U9.13@1172.42,1644.23 ; v1(2110,1455) 2128.74,1455 Q8.1@2147.4,1436.34 ; Q7.1@2377.4,1436.34 2377.4,1470 2402.4,1495 R41.1@2482.28,1495 2480,1492.72 Q14.5@2480,1457.4
  Top Layer w10: v1(2340,1460) 2353.74,1460 Q7.1@2377.4,1436.34
  Signal Layer 2 w8: v1(1165,1670) 1155,1660 1155,1385.2 1180.2,1360 1426.72,1360 1496.72,1290 1614.8,1290 1634.8,1270 1918.13,1270 2103.13,1455 v1(2110,1455)
  Bottom Layer w8: Q6.1@2072.6,1436.34 2091.26,1455 v1(2110,1455) 2110,1475 2130,1495 2305,1495 v1(2340,1460)
  Bottom Layer w10: Q9.1@2302.6,1436.34 2326.26,1460 v1(2340,1460)
EXT_VOLT_SEL: J1.11 U9.49 | length 445.5
  Top Layer w8: U9.49@1433.54,1480.16 1459.84,1480.16 v1(1480,1460) ; v1(1460,1635) 1615,1635 1631.38,1651.38 J1.11@1631.38,1680.63
  Bottom Layer w8: v1(1460,1635) 1460,1621.87 1474,1607.87 1474,1466 v1(1480,1460)
EXT_VOLT_WAVE: J1.12 U9.21 | length 808.6
  Top Layer w8: v1@1080.16,1499.84 v1@1085,1499.84 ; v1(1085,1500) 1085.16,1499.84 U9.21@1126.46,1499.84 ; v1(1100,1680) 1135,1715 1600,1715 1615.63,1699.37 J1.12@1615.63,1680.63
  Bottom Layer w8: v1(1085,1500) 1060,1525 1060,1640 v1(1100,1680)
G1: Q12.5 U11.5 | length 197.5
  Top Layer w10: v1(3330,1420) U11.5@3366.57,1420 ; Q12.5@3337.4,1540 v1(3360,1540)
  Bottom Layer w10: v1(3330,1420) 3330,1520 3350,1540 v1(3360,1540)
G2: Q12.2 R36.2 U11.4 | length 371.4
  Top Layer w10: v1(3240,1540) Q12.2@3262.6,1540 ; v1(3330,1385) 3364.17,1385 U11.4@3366.57,1382.6 3402.6,1382.6 3415,1395 R36.2@3415,1422.28
  Bottom Layer w10: v1(3240,1540) 3240,1410 3265,1385 v1(3330,1385)